# Altium PCB AIRZAI_LED_SENSE_FLEX_REVA.PcbDoc (part 2 of 2)
Units mil, origin at the board's own origin, x right, y up, seen from the top; angles counter-clockwise.
Board outline 2968.82 x 4325.31 mil, 2 copper layers (Top Layer, Bottom Layer); 51 components, 38 nets, 146 pads, 75 vias.
Unrouted connection lines stored in the file: 65.
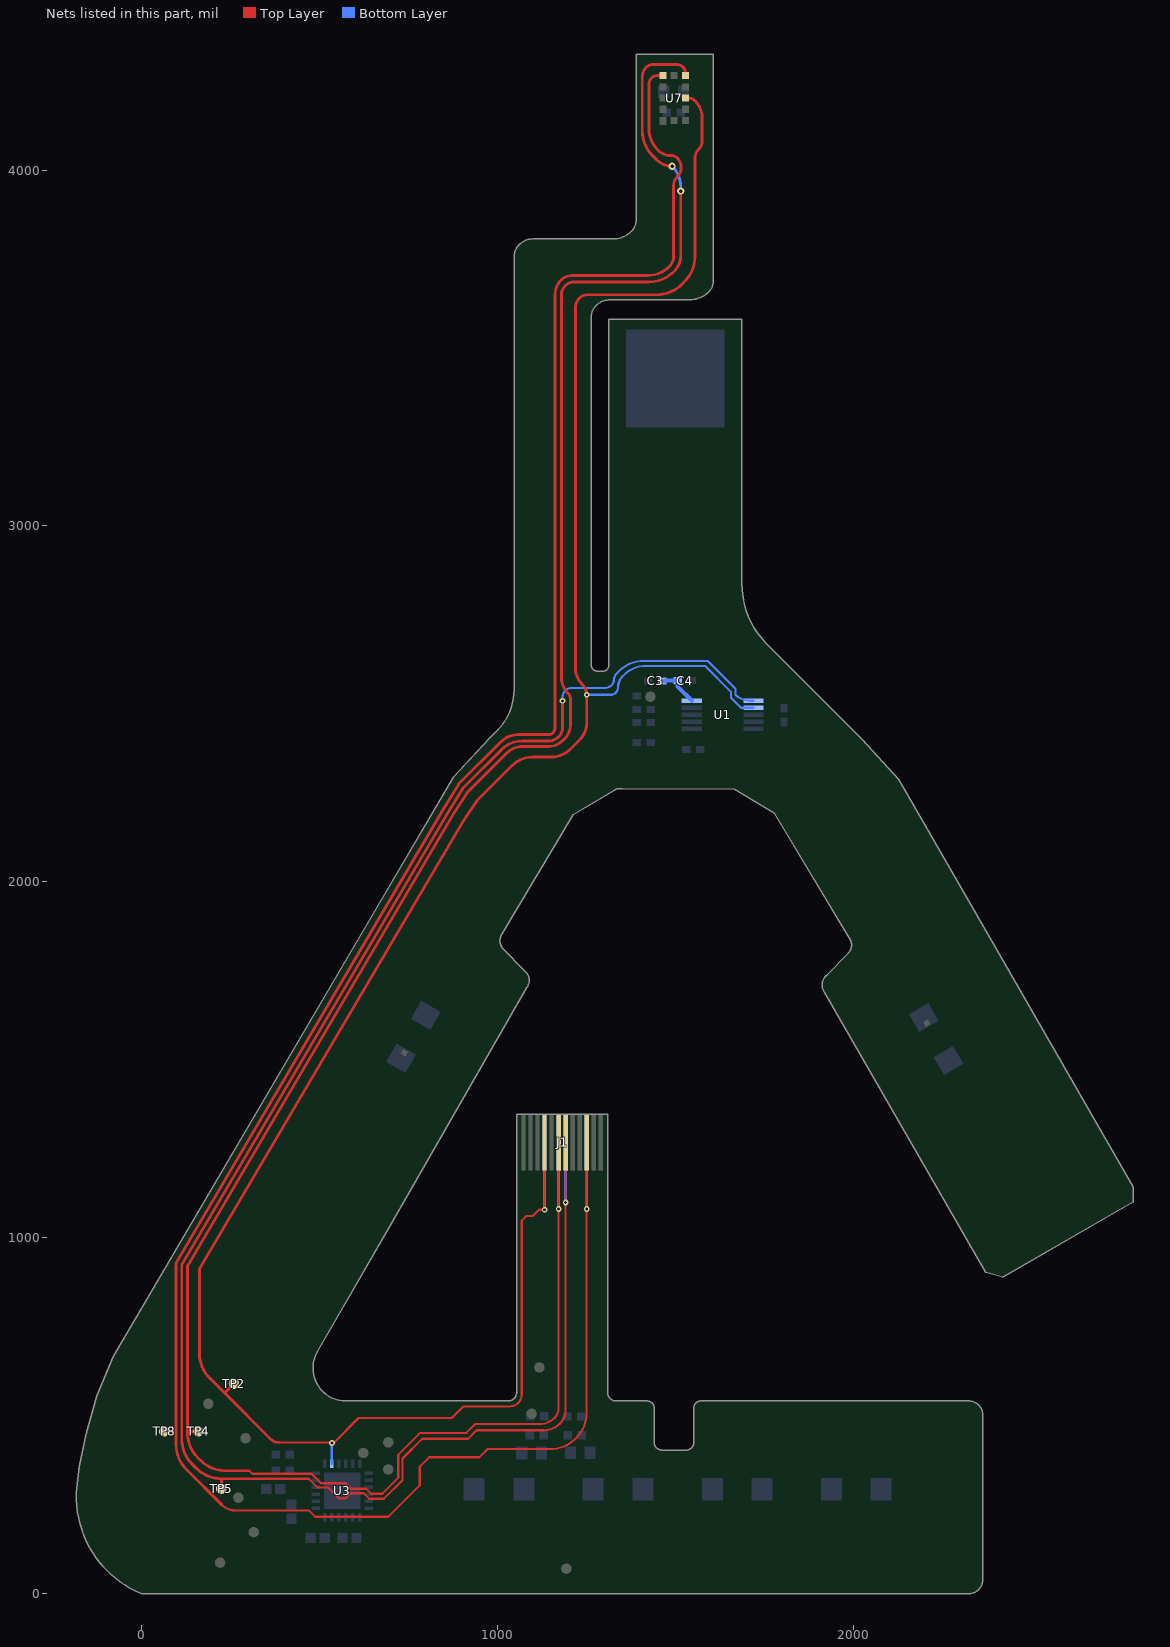
[diagram p2: the nets of this part, all layers, seen from the top]

## Via types
v1: diameter 16, hole 8, Top Layer to Bottom Layer, tented both sides, 53 vias
v2: diameter 20, hole 10, Top Layer to Bottom Layer, tented both sides, 17 vias
v3: diameter 20, hole 8, Top Layer to Bottom Layer, 5 vias

## Nets (pads, with @x,y where several pads share a name; then routed paths per layer and width w, separated by ;. In a path a pad name is that pad's centre, name@x,y a point inside that pad or via, vN(x,y) a via of type N, cw(c..) or ccw(c..) an arc to the next point about the centre after c; other vN are vias at no path point) (continued)
SDA: J1.9 TP2.1 U1.7 U3.8 U7.9 | length 6982.8
  Top Layer w6: 385.66,425.2 540.5,425.2 608.97,493.67 871.18,493.67 904.18,526.67 1034.04,526.67 ccw(c1034.04,560.81) 1058.18,536.67 ccw(c1035.77,559.08) 1067.46,559.08 1067.46,1048.27 1080.46,1061.27 1098.46,1061.27 1116.12,1078.93 v1(1131.92,1078.93) J1.9@1131.92,1267.93 J1.9@1131.92,1315.41
  Top Layer w8: 162.13,911.7 904.93,2173.05 942.18,2228.67 1040.14,2326.63 cw(c1098.18,2268.59) 1098.18,2350.67 1148.24,2350.67 ccw(c1148.24,2432.61) 1206.18,2374.67 1230.08,2398.57 ccw(c1181.56,2447.09) 1250.18,2447.09 1250.18,2524.2 ccw(c1206.32,2524.2) 1237.33,2555.21 cw(c1283.58,2601.46) 1218.18,2601.46 1218.18,3611.3 cw(c1259.71,3611.3) 1230.34,3640.67 cw(c1251.97,3619.04) 1251.97,3649.63 1446.72,3649.63 ccw(c1446.72,3749.63) 1517.43,3678.92 1524.89,3686.38 ccw(c1454.18,3757.09) 1554.18,3757.09 1554.18,4032.11 cw(c1591.74,4032.11) 1565.18,4058.67 ccw(c1543.45,4080.4) 1574.18,4080.4 1574.18,4147.8 ccw(c1509.31,4147.8) 1555.18,4193.67 ccw(c1534.65,4173.14) 1534.65,4202.18 U7.9@1527.18,4202.17 ; 162.18,911.67 162.18,676.1 ccw(c262.18,676.1) 191.47,605.39 233.18,563.68 ; TP2.1@259.18,590.46 233.18,563.68 ; 385.66,425.2 cw(c385.66,459) 361.76,435.1 233.18,563.68
  Bottom Layer w6: U3.8@533.97,364.79 533.97,418.67 v1@534.66,419.36 ; v1(1250.03,2525.67) 1318.21,2525.67 ccw(c1318.21,2544.91) 1331.82,2531.31 ccw(c1316.45,2546.67) 1338.18,2546.67 cw(c1381.64,2546.67) 1350.91,2577.4 1355.18,2581.67 cw(c1416.03,2520.82) 1416.03,2606.88 1582.47,2606.88 1655.02,2534.33 1655.02,2517.91 1683.54,2489.39 U1.7@1718.78,2489.39
  Bottom Layer w8: v1(1131.92,1078.93) J1.9@1131.92,1267.93 J1.9@1131.92,1269.07
  other v1: 534.66,423.36
SWIPE/TO2/RDY: J1.6 TP5.1 U1.6 | length 5457.6
  Top Layer w6: 291.55,323.36 469.66,323.36 494.66,298.36 524.39,298.36 555.55,267.2 571.55,267.2 586.71,282.36 623.69,282.36 639.18,266.87 680.18,266.87 732.55,319.25 732.55,380.2 788.02,435.67 916.83,435.67 940.42,459.26 1129.39,459.26 ccw(c1129.39,523.86) 1175.07,478.18 ccw(c1136.66,516.58) 1190.97,516.58 v1(1190.97,1099.27) J1.6@1190.97,1267.93 J1.6@1190.97,1332.27
  Top Layer w8: 112.5,924.7 862.4,2198.1 901.18,2262.11 1011.24,2372.17 cw(c1067.98,2315.42) 1067.98,2395.67 1142.21,2395.67 ccw(c1142.21,2436.64) 1171.18,2407.67 ccw(c1144.62,2434.23) 1182.18,2434.23 v1(1182.18,2508.67) ; 112.55,924.67 112.55,434.62 ccw(c212.55,434.62) 141.84,363.91 153.1,352.65 ccw(c223.81,423.36) 223.81,323.36 ; TP5.1@223.18,295.2 223.81,323.36 ; 291.55,323.36 223.81,323.36
  Bottom Layer w6: v1(1182.18,2508.67) 1182.18,2518.36 cw(c1209.49,2518.36) 1190.18,2537.67 cw(c1207.08,2520.77) 1207.08,2544.67 1299.07,2544.67 ccw(c1299.07,2576.11) 1321.29,2553.88 ccw(c1309.5,2565.67) 1326.18,2565.67 cw(c1354.4,2565.67) 1334.44,2585.63 1340.49,2591.67 cw(c1410.5,2521.66) 1410.5,2620.67 1589.99,2620.67 1668.18,2542.48 1668.18,2525.67 ccw(c1708.25,2565.74) 1708.25,2509.07 U1.6@1718.78,2509.07
  Bottom Layer w8: v1(1190.97,1099.27) J1.6@1190.97,1267.93
TOFINT: J1.7 TP4.1 U7.7 | length 6992.7
  Top Layer w6: 286.55,345.78 302.24,345.78 310.82,337.2 476.74,337.2 503.58,310.36 572.55,310.36 587.71,295.2 630.55,295.2 644.55,281.2 675.55,281.2 720.55,326.2 720.55,390.2 782.41,452.06 911.57,452.06 936.18,476.67 1116.72,476.67 ccw(c1116.72,538.13) 1160.18,494.67 ccw(c1133.36,521.49) 1171.29,521.49 v1(1171.29,1081.27) J1.7@1171.29,1267.93 J1.7@1171.29,1314.27
  Top Layer w8: 128.65,921.7 875.7,2190.26 914.18,2250.67 1025,2361.49 cw(c1071.3,2315.19) 1071.3,2380.67 1143.55,2380.67 ccw(c1143.55,2435.3) 1182.18,2396.67 1188.93,2403.42 ccw(c1151.53,2440.82) 1204.42,2440.82 1204.42,2513.19 ccw(c1179.7,2513.19) 1197.18,2530.67 cw(c1240.64,2574.13) 1179.18,2574.13 1179.18,3649.11 cw(c1216.74,3649.11) 1190.18,3675.67 cw(c1214.32,3651.53) 1214.32,3685.67 1424.76,3685.67 ccw(c1424.76,3785.67) 1495.47,3714.96 ccw(c1450.3,3760.13) 1514.18,3760.13 v2(1514.18,3940.67) ; 128.7,921.67 128.7,447.15 ccw(c228.55,452.62) 157.84,381.91 164.68,375.07 ccw(c235.39,445.78) 235.39,345.78 286.55,345.78 ; 129.18,455.67 TP4.1@159.18,456.41 ; v2(1490.18,4010.67) cw(c1490.18,4072.04) 1446.8,4028.63 1435.47,4039.96 cw(c1506.18,4110.67) 1406.18,4110.67 1406.18,4262.11 cw(c1443.74,4262.11) 1417.18,4288.67 cw(c1436.49,4269.36) 1436.49,4296.67 1502.15,4296.67 cw(c1502.15,4269.76) 1521.18,4288.79 cw(c1506.69,4274.3) 1527.18,4274.3 U7.7@1527.18,4265.17
  Bottom Layer w8: v1(1171.29,1081.27) J1.7@1171.29,1267.93 ; v2(1490.18,4010.67) cw(c1432.24,3952.73) 1514.18,3952.73 v2(1514.18,3940.67)
VREG: C3.2 C4.2 U1.5 | length 111.3
  Bottom Layer w12: C3.2@1468.17,2563.23 1470.48,2565.54 C4.2@1505.48,2565.54 1505.48,2549.14 U1.5@1545.55,2509.07
XSHUNT: J1.3 TP8.1 U7.5 | length 7054
  Top Layer w6: 224.59,250.16 ccw(c262.87,288.45) 262.87,234.31 469.44,234.31 487.39,216.36 692.66,216.36 781.18,304.88 781.18,357.36 807.49,383.67 948.49,383.67 971.32,406.5 1147.93,406.5 ccw(c1147.93,506.5) 1218.64,435.79 1220.74,437.89 ccw(c1150.03,508.6) 1250.03,508.6 v1(1250.03,1081.27) J1.3@1250.03,1267.93 J1.3@1250.03,1314.27
  Top Layer w8: TP8.1@65.18,455.67 96.55,455.67 ; 96.5,929.7 848.33,2206.38 890.18,2274.67 1008.74,2393.24 cw(c1058.08,2343.9) 1058.08,2413.67 1144.52,2413.67 ccw(c1144.52,2427.33) 1154.18,2417.67 ccw(c1137.28,2434.57) 1161.18,2434.57 1161.18,3649.63 cw(c1219.22,3649.63) 1178.18,3690.67 cw(c1209.56,3659.29) 1209.56,3703.67 1421.82,3703.67 ccw(c1421.82,3789.03) 1482.18,3728.67 ccw(c1453.21,3757.64) 1494.18,3757.64 1494.18,3955.67 cw(c1532.11,3955.67) 1505.29,3982.49 1506.47,3983.67 ccw(c1485.44,4004.7) 1515.18,4004.7 1515.18,4008.99 ccw(c1481.45,4008.99) 1505.3,4032.84 ccw(c1486.39,4013.93) 1486.39,4040.67 cw(c1486.39,4091.88) 1450.18,4055.67 cw(c1511.55,4117.04) 1424.76,4117.04 1424.76,4240.75 cw(c1450.1,4240.75) 1432.18,4258.67 cw(c1447.86,4242.99) 1447.86,4265.17 U7.5@1464.19,4265.17 ; 96.55,929.67 96.55,455.67 ; 224.59,250.16 125.84,348.91 cw(c196.55,419.62) 96.55,419.62 96.55,455.67
  Bottom Layer w8: v1(1250.03,1081.27) J1.3@1250.03,1267.93
pads on no net: U7.8

## Polygon pours and split planes (outlines as drawn)
GND on Top Layer "GND TOP" (hatched 45Degree grid 30 track 9.5, remove dead copper, pour order 21): 0,0.05 cw(c111.74,273.59) -183.56,283.87 -175.82,357.67 -155.82,450.67 -126.82,555.67 -80.5,666.24 653.96,1917.4 874.71,2293.44 977.95,2404.51 997.98,2424.54 ccw(c882.06,2540.46) 1045.99,2540.46 1045.99,2566.43 1045.99,3755.43 cw(c1095.33,3755.43) 1060.44,3790.31 cw(c1099.07,3751.69) 1099.07,3806.31 1323.33,3806.31 ccw(c1323.33,3881.43) 1376.44,3828.31 ccw(c1346.14,3858.61) 1388.99,3858.61 1388.99,4325.31 1605.53,4325.31 1605.53,3687.73 cw(c1562.68,3687.73) 1592.98,3657.43 cw(c1539.87,3710.54) 1539.87,3635.43 1315.61,3635.43 ccw(c1315.61,3580.8) 1276.98,3619.43 ccw(c1311.86,3584.55) 1262.53,3584.55 1262.53,2609.67 ccw(c1281.62,2610.76) 1279.79,2591.73 1296.42,2591.73 ccw(c1295.22,2608.47) 1311.97,2609.67 1311.97,3580.15 1685.99,3580.15 1685.99,2838.32 ccw(c1927.41,2838.32) 1756.7,2667.61 2024.31,2400 2126.58,2288.04 2344.06,1910.1 2785.18,1143.49 2785.18,1100.61 2420.99,890.99 2419.21,889.97 2371.12,902.93 1917.64,1691.01 cw(c1945.14,1710.92) 1925.23,1738.42 1985.58,1800.55 1991.58,1809.55 1994.58,1822.55 1991.58,1835.55 1777.54,2192.62 1664.98,2260.71 1349.99,2262.07 1342.93,2262.11 1335.87,2262.03 1212.79,2189.33 1008.19,1848.01 1008.24,1847.99 1005.24,1834.99 1008.24,1821.99 1014.24,1812.99 1074.59,1750.85 cw(c1054.68,1723.35) 1082.18,1703.45 697.75,1035.36 495.3,683.53 ccw(c574.01,634.2) 563.5,541.91 625.45,541.91 625.68,541.67 1029.79,541.67 ccw(c1029.3,565.55) 1053.18,566.03 1053.18,1346.67 1309.08,1346.67 1309.08,565.67 ccw(c1332.96,565.55) 1332.84,541.67 1419.87,541.67 cw(c1419.91,522.02) 1439.56,522.05 1439.56,425.37 ccw(c1461.52,425.64) 1461.79,403.67 1528.87,403.67 ccw(c1529.14,425.64) 1551.1,425.37 1551.1,522.05 cw(c1570.87,522.14) 1570.79,541.91 2321.18,541.91 2323.18,541.91 cw(c2323.18,501.91) 2363.18,501.91 2363.18,41 cw(c2322.18,41) 2322.18,0 2098.42,0
3V3 on Top Layer "3.3V Top 1" (solid, remove dead copper, pour order 16): 1056.18,2430.95 1144.18,2430.95 1144.18,3663.04 cw(c1198.81,3663.04) 1160.18,3701.67 cw(c1203.63,3658.22) 1203.64,3719.67 1419.9,3719.67 ccw(c1419.89,3787.96) 1468.18,3739.67 ccw(c1446.45,3761.4) 1477.18,3761.4 1477.18,3949.67 1401.18,3949.67 1401.18,3858.13 cw(c1339.73,3858.12) 1383.18,3814.67 cw(c1330.07,3867.78) 1330.07,3792.67 1104.98,3792.67 ccw(c1104.98,3744.88) 1071.18,3778.67 ccw(c1107.39,3742.46) 1056.18,3742.46
GND on Bottom Layer "gnd bot" (hatched 45Degree grid 30 track 9.5, remove dead copper, pour order 22): 0,0.05 cw(c111.74,273.59) -183.56,283.87 -175.82,357.67 -155.82,450.67 -126.82,555.67 -80.5,666.24 653.96,1917.4 874.71,2293.44 977.95,2404.51 997.98,2424.54 ccw(c882.06,2540.46) 1045.99,2540.46 1045.99,2566.43 1045.99,3755.43 cw(c1095.33,3755.43) 1060.44,3790.31 cw(c1099.07,3751.69) 1099.07,3806.31 1323.33,3806.31 ccw(c1323.33,3881.43) 1376.44,3828.31 ccw(c1346.14,3858.61) 1388.99,3858.61 1388.99,4325.31 1605.53,4325.31 1605.53,3687.73 cw(c1562.68,3687.73) 1592.98,3657.43 cw(c1539.87,3710.54) 1539.87,3635.43 1315.61,3635.43 ccw(c1315.61,3580.8) 1276.98,3619.43 ccw(c1311.86,3584.55) 1262.53,3584.55 1262.53,2609.67 ccw(c1281.62,2610.76) 1279.79,2591.73 1296.42,2591.73 ccw(c1295.22,2608.47) 1311.97,2609.67 1311.97,3580.15 1685.99,3580.15 1685.99,2838.32 ccw(c1927.41,2838.32) 1756.7,2667.61 2024.31,2400 2126.58,2288.04 2344.06,1910.1 2785.18,1143.49 2785.18,1100.61 2420.99,890.99 2419.21,889.97 2371.12,902.93 1917.64,1691.01 cw(c1945.14,1710.92) 1925.23,1738.42 1985.58,1800.55 1991.58,1809.55 1994.58,1822.55 1991.58,1835.55 1777.54,2192.62 1664.98,2260.71 1349.99,2262.07 1342.93,2262.11 1335.87,2262.03 1212.79,2189.33 1008.19,1848.01 1008.24,1847.99 1005.24,1834.99 1008.24,1821.99 1014.24,1812.99 1074.59,1750.85 cw(c1054.68,1723.35) 1082.18,1703.45 697.75,1035.36 495.3,683.53 ccw(c574.01,634.2) 563.5,541.91 625.45,541.91 625.68,541.67 1029.79,541.67 ccw(c1029.3,565.55) 1053.18,566.03 1053.18,1346.67 1309.08,1346.67 1309.08,565.67 ccw(c1332.96,565.55) 1332.84,541.67 1419.87,541.67 cw(c1419.91,522.02) 1439.56,522.05 1439.56,425.37 ccw(c1461.52,425.64) 1461.79,403.67 1528.87,403.67 ccw(c1529.14,425.64) 1551.1,425.37 1551.1,522.05 cw(c1570.87,522.14) 1570.79,541.91 2321.18,541.91 2323.18,541.91 cw(c2323.18,501.91) 2363.18,501.91 2363.18,41 cw(c2322.18,41) 2322.18,0 2098.42,0
3V3 on Bottom Layer "3v3 bot 1" (solid, remove dead copper, pour order 14): 67.18,10.67 3.18,10.67 -46.82,37.67 -86.82,71.67 -122.82,117.67 -141.82,150.67 -163.82,213.7 -169.82,273.36 -162.82,351.2 -144.82,434.2 -113.82,553.94 -66.82,661.67 36.18,837.67 260.18,1218.67 542.18,1697.67 806.18,2141.67 886.18,2283.67 1015.18,2419.73 1050.87,2455.41 cw(c1121.57,2384.71) 1121.58,2484.7 1346.18,2484.7 1346.18,2435.83 1138.13,2435.83 ccw(c1139.73,2322.09) 1058.17,2401.38 940.15,2283.37 870.18,2178.67 -7.82,686.67 -60.82,576.85 -88.82,471.67 -115.82,358.67 -121.82,293.67 -118.82,231.67 -98.82,174.67 -66.82,128.67 -29.82,91.67 11.18,63.67 31.18,54.67 62.18,51.67 67.18,51.67

## Keep-outs
Keep-Out Layer:
  lines w1.97: 1052.18,1346.67 cw(c1053.18,1346.67) 1053.18,1347.67 1309.08,1347.67 cw(c1309.08,1346.67) 1310.08,1346.67
  lines w5: -184.08,268.87 -183.56,283.87 -175.82,357.67 -155.82,450.67 -126.82,555.67 -80.5,666.24 653.96,1917.4 874.71,2293.44 977.95,2404.51 997.98,2424.54 1003.53,2430.37 1013.73,2442.81 1022.67,2456.18 1030.25,2470.37 1036.41,2485.23 1041.08,2500.63 1044.22,2516.41 1045.8,2532.42 1045.99,2540.46 1045.99,2566.43 1045.99,3755.43 1045.99,3760.29 1047.89,3769.82 1051.61,3778.8 1057.01,3786.88 1060.44,3790.31 1064.25,3794.12 1073.2,3800.1 1083.14,3804.21 1093.69,3806.31 1323.33,3806.31 1330.69,3806.67 1345.13,3809.55 1358.74,3815.18 1370.98,3823.36 1376.44,3828.31 1379.27,3831.43 1383.93,3838.41 1387.15,3846.18 1388.79,3854.41 1388.99,3858.61 1388.99,4325.31 1605.53,4325.31 1605.53,3687.73 1605.53,3683.51 1603.88,3675.23 1600.65,3667.43 1595.96,3660.42 1592.98,3657.43 1587.75,3652.2 1575.45,3643.98 1561.78,3638.32 1547.26,3635.43 1315.61,3635.43 1310.25,3635.17 1299.75,3633.08 1289.86,3628.98 1280.95,3623.03 1276.98,3619.43 1273.73,3615.84 1268.35,3607.8 1264.65,3598.87 1262.77,3589.38 1262.53,3584.55 1262.53,2609.67 1263.02,2606.32 1265.72,2600.14 1270.39,2595.28 1276.47,2592.35 1279.79,2591.73 1296.42,2591.73 1299.67,2592.28 1305.52,2595.21 1309.81,2600.17 1311.88,2606.38 1311.97,2609.67 1311.97,3580.15 1685.99,3580.15 1685.99,2838.32 1686.28,2826.48 1688.6,2802.9 1693.22,2779.66 1700.1,2756.99 1709.17,2735.1 1720.33,2714.21 1733.5,2694.51 1748.53,2676.19 1756.7,2667.61 2024.31,2400 2126.58,2288.04 2344.06,1910.1 2785.18,1143.49 2785.18,1100.61 2420.99,890.99 2419.21,889.97 2371.12,902.93 1917.64,1691.01 1915.68,1693.72 1912.89,1699.8 1911.34,1706.3 1911.09,1712.98 1912.14,1719.59 1914.47,1725.86 1917.97,1731.55 1922.52,1736.46 1925.23,1738.42 1985.58,1800.55 1991.58,1809.55 1994.58,1822.55 1991.58,1835.55 1777.54,2192.62 1664.98,2260.71 1349.99,2262.07 1342.93,2262.11 1335.87,2262.03 1212.79,2189.33 1008.24,1847.99 1005.24,1834.99 1008.24,1821.99 1014.24,1812.99 1074.59,1750.85 1077.3,1748.89 1081.84,1743.99 1085.35,1738.29 1087.67,1732.02 1088.73,1725.42 1088.48,1718.74 1086.93,1712.23 1084.14,1706.15 1082.18,1703.45 697.75,1035.36 495.3,683.53 491.43,676.75 485.48,662.33 482.02,647.13 481.16,631.55 482.91,616.06 487.23,601.07 493.99,587.02 503.02,574.29 514.04,563.26 526.76,554.23 540.8,547.45 555.78,543.12 563.5,541.91 625.68,541.67 1029.79,541.67 1034.44,542.22 1042.97,545.96 1049.42,552.69 1052.82,561.37 1053.18,566.03 1053.18,1346.67 1309.08,1346.67 1309.08,565.67 1309.52,561.01 1313.04,552.39 1319.59,545.76 1328.18,542.15 1332.84,541.67 1419.87,541.67 1423.78,541.68 1431.01,538.7 1436.55,533.18 1439.55,525.96 1439.56,522.05 1439.56,425.37 1440.03,421.09 1443.41,413.21 1449.54,407.23 1457.5,404.04 1461.79,403.67 1528.87,403.67 1533.16,404.04 1541.12,407.23 1547.25,413.21 1550.63,421.09 1551.1,425.37 1551.1,522.05 1551.09,525.98 1554.06,533.26 1559.6,538.85 1566.85,541.89 1570.79,541.91 2321.18,541.91 2327.12,541.91 2334.85,540.37 2342.13,537.35 2348.68,532.98 2354.25,527.41 2358.63,520.85 2361.64,513.57 2363.18,505.85 2363.18,501.91 2363.18,41 2363.18,36.96 2361.6,29.04 2358.51,21.58 2354.03,14.86 2348.32,9.15 2341.6,4.67 2334.14,1.58 2326.22,0 2098.42,0 0,0.05 -13.89,5.73 -40.38,19.83 -65.31,36.55 -88.41,55.7 -109.45,77.1 -128.22,100.52 -144.52,125.72 -158.18,152.44 -169.07,180.41 -177.06,209.34 -182.08,238.93 -184.08,268.87 ; 703.37,1551.94 781.85,1506.76 822.94,1578.13 744.47,1623.32 703.37,1551.94 ; 962.19,247.95 1044.87,247.95 1044.87,338.5 962.19,338.5 962.19,247.95 ; 1296.83,247.95 1379.51,247.95 1379.51,338.5 1296.83,338.5 1296.83,247.95 ; 1631.48,247.95 1714.16,247.95 1714.16,338.51 1631.48,338.51 1631.48,247.95 ; 1966.13,247.95 2048.8,247.95 2048.8,338.5 1966.13,338.5 1966.13,247.95 ; 2172.02,1571.8 2213.11,1500.42 2291.59,1545.6 2250.49,1616.98 2172.02,1571.8

## Other copper
Top Layer:
  pour cut-out: 1465.18,3251.67 1465.18,2866.67 1467.18,2851.67 1472.18,2833.67 1480.18,2814.67 1486.18,2804.67 1492.18,2795.67 1506.47,2779.67 1754.18,2530.67 1754.18,2484.67 1660.18,2483.67 1660.18,2414.53 1764.18,2413.67 1764.18,2406.67 1843.18,2406.67 1843.18,2525.67 1839.18,2526.67 1838.18,2528.67 1838.18,2534.67 1836.18,2540.67 1831.18,2550.67 1813.18,2569.67 1549.18,2833.67 1540.18,2846.67 1535.18,2860.67 1533.18,2869.67 1533.18,3251.67
  pour cut-out: 1602.18,2329.67 1861.18,2271.67 1862.18,2270.67 2139.18,1807.67 2200.18,1834.67 2185.18,1863.67 1911.18,2321.69 1907.18,2326.67 1900.1,2331.67 1892.18,2334.67 1602.18,2399.67
  pour cut-out: 1349.18,2411.67 1349.18,2467.67 1407.18,2467.67 1408.18,2468.67 1408.18,2500.67 1603.83,2500.67 1605.18,2499.32 1605.18,2405.95 1612.18,2405.95 1612.18,2327.67 1592.18,2331.67 1487.18,2331.67 1487.18,2351.67 1389.62,2351.67 1124.18,2229.67 887.18,1810.67 825.18,1844.67 1071.18,2277.67 1076.18,2283.67 1082.18,2287.67
  pour cut-out: 1311.97,3246.67 1685.99,3246.67 1685.99,3580.15 1311.97,3580.15
  pour cut-out: 1052.18,1346.67 1052.18,1169.27 1310.08,1169.27 1310.08,1346.67
Bottom Layer:
  rectangle net 3V3: 1314.18,2439.67 1402.18,2457.67
  rectangle net 3V3: 1422.46,4073.51 1476.18,4242.67
  rectangle net 3V3: 1401.18,3896.4 1471.18,4242.67
  rectangle net 3V3: 56.18,10.67 1210.18,51.67
  rectangle net +5V: 830.18,78.67 1157.18,134.2
  rectangle net 3V3: 1173.18,25.67 1210.18,530.67
  rectangle net NetJ1_11: 1221.18,479.67 1253.18,586.67
  rectangle net NetJ1_11: 1100.18,549.01 1253.18,586.67
  rectangle net NetJ1_11: 1100.18,549.01 1131.25,1013.67
  rectangle net NetJ1_12: 1067.62,480.67 1104.18,530.67
  rectangle net NetJ1_12: 1063.18,480.67 1092.69,1013.67
  rectangle net +5V: 1117.29,82.67 1157.18,530.67
  pour cut-out: 476.88,376.2 cw(c475.63,374.94) 477.4,374.94 477.4,202.76 648.09,202.76 648.09,376.6 477.55,376.6
  pour cut-out: 2129.18,1834.67 2180.18,1862.67 2191.18,1856.67 2198.18,1849.67 2203.18,1839.67 2204.18,1830.67 2216.18,1808.67 2231.18,1816.67 2457.18,1426.67 2233.18,1297.67 2004.18,1694.67 2155.18,1776.67 2147.18,1795.67 2137.18,1803.67 2132.18,1809.67 2129.18,1819.67
  pour cut-out: 844.18,1866.67 897.18,1838.67 896.18,1824.67 893.18,1816.67 889.18,1809.67 883.18,1803.67 866.18,1769.67 868.18,1766.67 985.18,1698.67 764.18,1308.67 763.18,1306.67 726.18,1323.67 541.18,1431.67 557.18,1468.42 762.18,1819.67 763.18,1822.67 805.18,1804.67 820.18,1833.67 822.94,1846.67 829.18,1855.67 835.18,1862.67
  pour cut-out: 1052.18,1346.67 1052.18,1169.27 1309.08,1169.27 1309.08,1346.67

## Silkscreen, mask and mechanical layers (free items; w line width, h text height)
Mechanical 2:
  drawing of 398 lines, arcs and shapes, not listed
Mechanical 3:
  lines w6: 1274.18,584.67 1274.18,565.67 ; 1278.46,1166.27 1278.46,1147.27 ; 1293.07,565.67 1274.18,565.67 ; 1297.35,1147.27 1278.46,1147.27 ; 1528.46,1263.27 1394.46,1263.27 1278.46,1147.27 ; 1533.18,765.67 1474.18,765.67 1274.18,565.67 ; 1570.98,4070.95 1570.98,4051.95 ; 1589.87,4051.95 1570.98,4051.95 ; 1592.98,3232.95 1592.98,3213.95 ; 1601.98,2650.95 1601.98,2631.95 ; 1611.87,3213.95 1592.98,3213.95 ; 1620.87,2631.95 1601.98,2631.95 ; 1793.98,4199.95 1718.98,4199.95 1570.98,4051.95 ; 1815.98,3361.95 1740.98,3361.95 1592.98,3213.95 ; 1824.98,2779.95 1749.98,2779.95 1601.98,2631.95
  text "BEND DOWN" at 1819.98,4177.95 h40
  text "BEND UP" at 1839.98,3342.95 h40
  text "BEND DOWN" at 1848.98,2760.95 h40
  text "BEND DOWN" at 1557.46,1246.27 h40
  text "BEND DOWN" at 1558.18,752.47 h40
Mechanical 4:
  lines w1.97: 0,0 2098.42,0 2322.18,0 ccw(c2322.18,41) 2363.18,41 2363.18,500.67 2363.18,501.91 ccw(c2323.18,501.91) 2323.18,541.91 2321.18,541.91 1570.79,541.91 ccw(c1570.87,522.14) 1551.1,522.05 1551.1,425.37 cw(c1529.14,425.64) 1528.87,403.67 1461.79,403.67 cw(c1461.52,425.64) 1439.56,425.37 1439.56,522.05 ccw(c1419.91,522.02) 1419.87,541.67 1332.84,541.67 cw(c1332.96,565.55) 1309.08,565.67 1309.08,1346.67 1053.18,1346.67 1053.18,566.03 cw(c1029.3,565.55) 1029.79,541.67 787.97,541.67 625.68,541.67 ; 0,0.05 cw(c111.74,273.59) -183.56,283.87 -175.82,357.67 -155.82,450.67 -126.82,555.67 -80.5,666.24 653.96,1917.4 874.71,2293.44 977.95,2404.51 997.98,2424.54 ccw(c882.06,2540.46) 1045.99,2540.46 1045.99,2566.43 ; 625.45,541.91 563.5,541.91 cw(c574.01,634.2) 495.3,683.53 697.75,1035.36 1082.18,1703.45 ccw(c1054.68,1723.35) 1074.59,1750.85 1014.24,1812.99 1008.24,1821.99 1005.24,1834.99 1008.24,1847.99 ; 1008.19,1848.01 1212.79,2189.33 1335.87,2262.03 1342.93,2262.11 1349.99,2262.07 1664.98,2260.71 1777.54,2192.62 1991.58,1835.55 1994.58,1822.55 1991.58,1809.55 1985.58,1800.55 1925.23,1738.42 ccw(c1945.14,1710.92) 1917.64,1691.01 2371.12,902.93 2419.21,889.97 2420.99,890.99 2785.18,1100.61 2785.18,1143.49 2344.06,1910.1 2126.58,2288.04 2024.31,2400 1756.7,2667.61 cw(c1927.41,2838.32) 1685.99,2838.32 1685.99,2871.49 1685.99,3580.15 1311.97,3580.15 1311.97,2871.49 1311.97,2609.67 cw(c1295.22,2608.47) 1296.42,2591.73 1279.79,2591.73 cw(c1281.62,2610.76) 1262.53,2609.67 1262.53,3543.49 1262.53,3584.55 cw(c1311.86,3584.55) 1276.98,3619.43 cw(c1315.61,3580.8) 1315.61,3635.43 1539.87,3635.43 ccw(c1539.87,3710.54) 1592.98,3657.43 ccw(c1562.68,3687.73) 1605.53,3687.73 ; 1045.99,3755.43 cw(c1095.33,3755.43) 1060.44,3790.31 cw(c1099.07,3751.69) 1099.07,3806.31 1323.33,3806.31 ccw(c1323.33,3881.43) 1376.44,3828.31 ccw(c1346.14,3858.61) 1388.99,3858.61 ; 703.37,1551.94 744.47,1623.32 822.94,1578.13 781.85,1506.76 703.37,1551.94 ; 962.19,247.95 1044.87,247.95 1044.87,338.5 962.19,338.5 962.19,247.95 ; 1296.83,247.95 1296.83,338.5 1379.51,338.5 1379.51,247.95 1296.83,247.95 ; 1631.48,247.95 1631.48,338.51 1714.16,338.51 1714.16,247.95 1631.48,247.95 ; 1966.13,247.95 1966.13,338.5 2048.8,338.5 2048.8,247.95 1966.13,247.95 ; 2172.02,1571.8 2213.11,1500.42 2291.59,1545.6 2250.49,1616.98 2172.02,1571.8
  lines w2: 1045.99,2566.43 1045.99,3755.43 ; 1388.99,3858.61 1388.99,4325.31
  lines w2.01: 1388.99,4325.31 1605.53,4325.31 1605.53,3687.73
  text "Flex PCB Outline" at 1198.18,-126.33 h60
Mechanical 5:
  circle w1.97: c952,686.79 r447.83
  circle w1.97: c1497.27,2613.24 r83.66
  circle w1.97: c2042.55,686.79 r447.83
  lines w1.97: -183.35,149.56 ccw(c-81.07,90.5) -81.07,-27.61 84.29,-27.61 84.29,27.51 cw(c123.66,27.51) 123.66,66.88 295.8,66.88 ccw(c295.8,106.25) 331.21,89.03 cw(c409.09,51.13) 495.71,51.13 495.71,-7.92 1465.77,-7.92 1465.77,98.38 cw(c1497.27,98.38) 1528.77,98.38 1528.77,-7.92 2498.84,-7.92 2498.84,51.13 cw(c2585.45,51.13) 2663.33,89.03 ccw(c2698.74,106.25) 2698.74,66.88 2870.88,66.88 cw(c2870.88,27.51) 2910.25,27.51 2910.25,-27.61 3075.61,-27.61 ccw(c3075.61,90.5) 3177.89,149.56 1599.56,2883.32 ccw(c1497.27,2824.26) 1394.98,2883.32 -183.35,149.56
  lines w7.87: 1057.76,34.67 1057.76,882.67 ; 1305.79,34.67 1305.79,882.67
Mechanical 15:
  pour cut-out: 744.47,1623.32
  pour cut-out: 2250.49,1616.98
  lines w1.97: 962.19,247.95 1044.86,247.95 ; 962.19,247.95 962.19,338.51 ; 962.19,247.95 1044.86,338.51 ; 962.19,338.51 1044.86,338.51 ; 962.19,338.51 1044.86,247.95 ; 1044.86,247.95 1044.86,338.51 ; 1296.83,247.95 1379.51,247.95 ; 1296.83,247.95 1296.83,338.51 ; 1296.83,247.95 1379.51,338.51 ; 1296.83,338.51 1379.51,338.51 ; 1296.83,338.51 1379.51,247.95 ; 1379.51,247.95 1379.51,338.51 ; 1631.48,247.95 1714.16,247.95 ; 1631.48,247.95 1631.48,338.51 ; 1631.48,247.95 1714.16,338.51 ; 1631.48,338.51 1714.16,338.51 ; 1631.48,338.51 1714.16,247.95 ; 1714.16,247.95 1714.16,338.51 ; 1966.12,247.95 2048.8,247.95 ; 1966.12,247.95 1966.12,338.51 ; 1966.12,247.95 2048.8,338.51 ; 1966.12,338.51 2048.8,338.51 ; 1966.12,338.51 2048.8,247.95 ; 2048.8,247.95 2048.8,338.51 ; 703.37,1551.94 781.85,1506.76 822.94,1578.13 744.47,1623.32 703.37,1551.94 ; 2172.02,1571.8 2250.49,1616.98 2291.59,1545.6 2213.11,1500.42 2172.02,1571.8
Drill Drawing:
  text "PWB, LED SENSE FLEX" at 5642.59,-3417.92 h157.48
  text "PWB-020218-001" at 5829.6,-3743.71 h127.95
  text "1" at 8254.8,-3802.76 h78.74
  text "1" at 8065.82,-3806.7 h78.74
Mechanical 17:
  text "PWA, LED SENSE FLEX" at 5534.33,-3440.56 h157.48
  text "PWA-020218-001" at 5928.03,-3733.86 h127.95
  text "1" at 8057.95,-3794.89 h59.06
  text "1" at 8246.92,-3794.89 h59.06
  text "NOTES: /  / 1. ALL ASSEMBLY MATERIALS TO BE RoHS COMPLIANT. /  / 2. MATERIAL: /           • FLEXIBLE METAL CLAD DIELECTRIC IAW                 /             IPC-4204/11 E1E2 O0/0 CU W7 T/T /           • STIFFENER IAW IPC-4203/1-E1E8M1 /  / 3. FINISH:  IMMERSION GOLD /  / ALL EXPOSED CONDUCTIVE PATTERN AREAS NOT COVERED WITH COVERLAY MATERIAL OR OTHER PLATING  / SHALL BE IMMERSION GOLD (0.000030-0.000090 mm) OVER ELECTROLESS NICKEL (0.001-0.006 mm). /  / 4. LEGEND SHALL BE WHITE, PERMANENT, ORGANIC, NON-CONDUCTIVE UV OR EPOXY TYPE INK APPLIED  / TO THE TOP SIDE OF THE BOARD. THERE SHALL BE NO LEGEND ON ANY SOLDERABLE COMPONENT LAND. /  / 5. ALL ASSEMBLY MATERIALS TO BE RoHS COMPLIANT. /  / 6. ANY LABELS OR COMPOSITION OF, APPLIED TO THE BOARD NEED TO BE APPROVIED BY AIRZAI /  / 7. MINIMUM TRACE WIDTHS: /           EXTERNAL: 0.203 mm  INTERNAL: N/A /  / 8. MINIMUM SPACE BETWEEN FEATURES: /          EXTERNAL: 0.15 mm  INTERNAL: N/A /  / 9. Overall Board Thickness: 0.3mm" at -5587.82,-3971.33 h86.61
Mechanical 18:
  lines w5: -6049.73,-1660.83 -5849.73,-1660.83 ; -6049.73,714.17 -5849.73,714.17 ; -6049.73,3089.17 -5849.73,3089.17 ; -3549.73,-4035.83 -3549.73,-3835.83 ; -3549.73,5264.17 -3549.73,5464.17 ; -1049.73,-4035.83 -1049.73,-3835.83 ; -1049.73,5264.17 -1049.73,5464.17 ; 1450.27,-4035.83 1450.27,-3835.83 ; 1450.27,5264.17 1450.27,5464.17 ; 3950.27,-4035.83 3950.27,-3835.83 ; 3950.27,5264.17 3950.27,5464.17 ; 4249.47,-3538.04 8749.47,-3538.04 ; 4249.47,-3296.31 5320.14,-3296.31 ; 4249.47,-3062.26 5320.14,-3062.26 ; 4249.47,-2851.43 5320.14,-2851.43 ; 4250.27,-3835.83 8750.27,-3835.83 ; 4875.26,-3839.03 4875.26,-2639.03 ; 5320.14,-3838.04 5320.14,-2638.04 ; 5320.14,-3171.11 8749.32,-3171.11 ; 5660.1,-2638.04 8749.47,-2638.04 ; 5749.47,-2638.04 4249.47,-2638.04 ; 6450.27,-4035.83 6450.27,-3835.83 ; 6450.27,5264.17 6450.27,5464.17 ; 8373.09,-3838.04 8373.09,-3538.04 ; 8750.27,-2635.83 8750.27,-3835.83 ; 8750.27,-1660.83 8950.27,-1660.83 ; 8750.27,714.17 8950.27,714.17 ; 8750.27,3089.17 8950.27,3089.17 ; 2849.47,-3838.04 4249.47,-3838.04 ; 2849.47,-3838.04 4249.47,-3838.04 ; 2849.47,-3838.04 2849.47,-2638.04 4249.47,-2638.04 ; 4249.47,-3838.04 8749.47,-3838.04 ; 4249.47,-3838.04 8749.47,-3838.04 ; 4249.47,-3838.04 4249.47,-2638.04 ; 8749.47,-3838.04 8749.47,-2638.04 ; 8749.47,-3838.04 8749.47,-2638.04 ; 8750.27,-3835.83 8750.27,5264.17 -5849.73,5264.17 -5849.73,-3835.83 8750.27,-3835.83 ; -6049.73,-4035.83 -6049.73,5464.17 8950.27,5464.17 8950.27,-4035.83 -6049.73,-4035.83
  text "1" at -4818.4,5334.17 h70
  text "2" at -2322.73,5334.17 h70
  text "3" at 166.61,5334.17 h70
  text "4" at 2673.28,5334.17 h70
  text "5" at 5172.27,5334.17 h70
  text "6" at 7677.27,5334.17 h70
  text "A" at -5974.73,4191.17 h70
  text "A" at 8825.27,4191.17 h70
  text "B" at -5974.73,1811.17 h70
  text "B" at 8825.27,1811.17 h70
  text "C" at -5974.73,-563.83 h70
  text "C" at 8825.27,-563.83 h70
  text "AIRZAI PROPRIETARY & CONFIDENTIAL" at 4405.39,-2527.17 h127.95
  text "DATE:" at 4905.77,-2700.25 h45
  text "ENGINEER:" at 4271.91,-2706.55 h45
  text "UNLESS OTHERWISE SPECIFIED" at 2949.08,-2767.18 h59.06
  text "21/01/19" at 4913.1,-2808.86 h59.06
  text "FD" at 4464.79,-2815.13 h78.74
  text "DIMENSIONS ARE IN MM" at 3071.13,-2893.16 h59.06
  text "PCB DESIGNER:" at 4267.98,-2914.93 h45
  text "DATE:" at 4893.96,-2916.78 h45
  text "D" at -5974.73,-2933.83 h70
  text "D" at 8825.27,-2933.83 h70
  text "AIRZAI" at 5611.1,-2972.05 h127.95
  text "TOLERANCES" at 3271.91,-3019.15 h59.06
  text "21/01/19" at 4913.1,-3023.43 h59.06
  text "DFM" at 4438.41,-3025.01 h78.74
  text "DATE:" at 4893.96,-3129.38 h45
  text "CHECK" at 4267.98,-3131.47 h45
  text "ANGULAR" at 3756.17,-3176.63 h59.06
  text "DECIMALS" at 2953.02,-3188.44 h59.06
  text "TITLE:" at 5371.92,-3234.85 h45
  text "FD" at 4504.16,-3248.2 h78.74
  text ".XX +/- .127MM" at 2905.77,-3345.92 h59.06
  text "+/-" at 3744.35,-3349.85 h59.06
  text "REL" at 4279.79,-3362.45 h45
  text "DATE:" at 4909.71,-3369.54 h45
  text "FD" at 4494.31,-3464.74 h78.74
  text ".XXX +/- .080MM" at 2893.96,-3507.33 h59.06
  text "REV:" at 8395.54,-3601.82 h45
  text "SCALE:" at 4915.22,-3602.61 h45
  text "DWG NO:" at 5366.4,-3610.48 h45
  text "SIZE" at 4279.79,-3613.63 h45
  text "B" at 4483.53,-3744.22 h120
  text "DO NOT SCALE DRAWING" at 2949.08,-3747.49 h70.87
  text "A" at 8479.21,-3763.39 h120
  text "1:1" at 4963.84,-3767.85 h120
  text "SHEET" at 7830.97,-3799.46 h45
  text "OF" at 8094.75,-3799.46 h45
  text "1" at -4818.4,-3965.83 h70
  text "2" at -2322.73,-3965.83 h70
  text "3" at 166.61,-3965.83 h70
  text "4" at 2673.28,-3965.83 h70
  text "5" at 5172.27,-3965.83 h70
  text "6" at 7677.27,-3965.83 h70